# Altium PCB XIAO-log^2-2.PcbDoc
Units mm, origin at the board's own origin, x right, y up, seen from the top; angles counter-clockwise.
Board outline 17.78 x 20.96 mm, 2 copper layers (Top Layer, Bottom Layer); 17 components, 20 nets, 56 pads, 10 vias.
Unrouted connection lines stored in the file: 9.
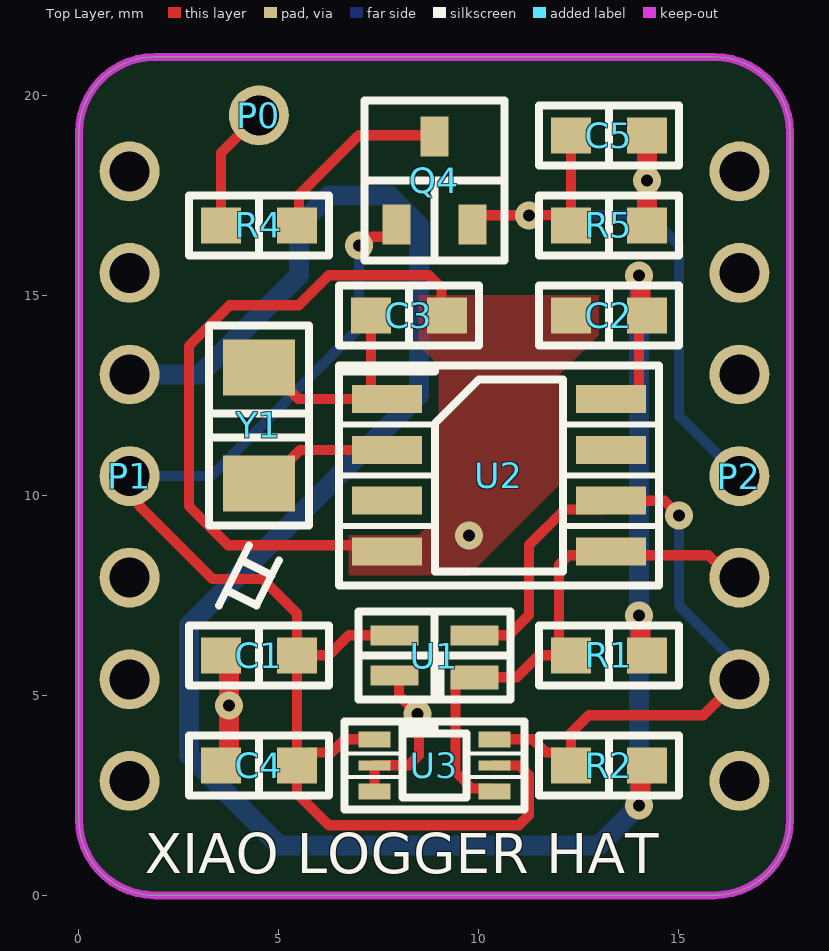
[diagram p0: Top Layer view]
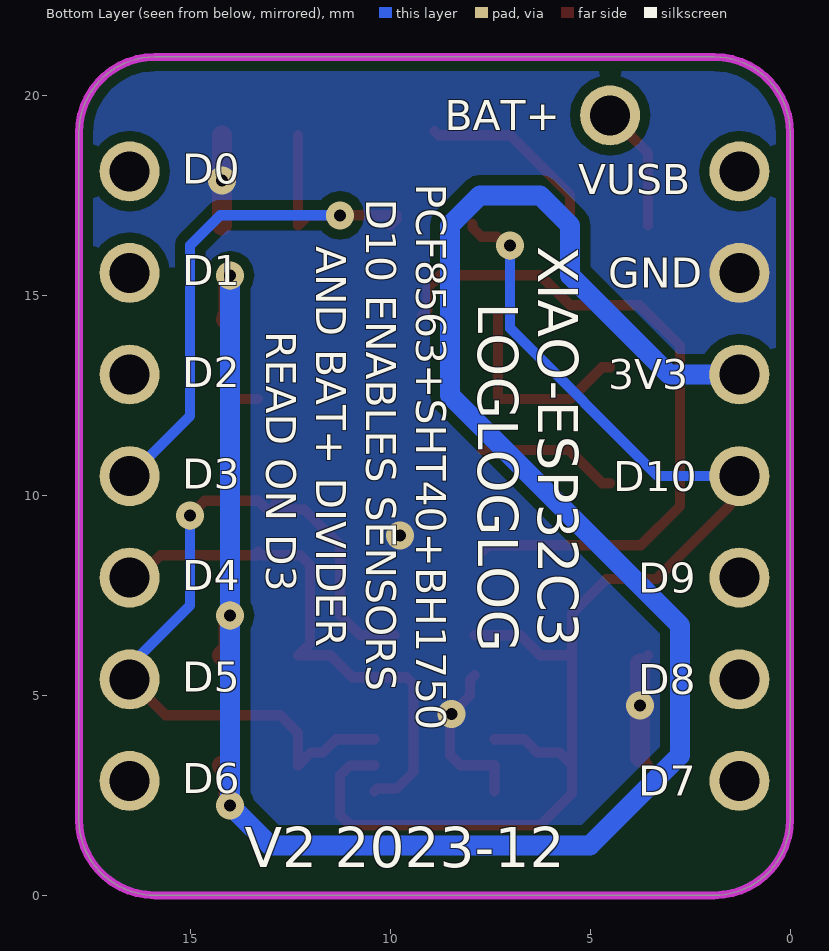
[diagram p1: Bottom Layer view, seen from below]
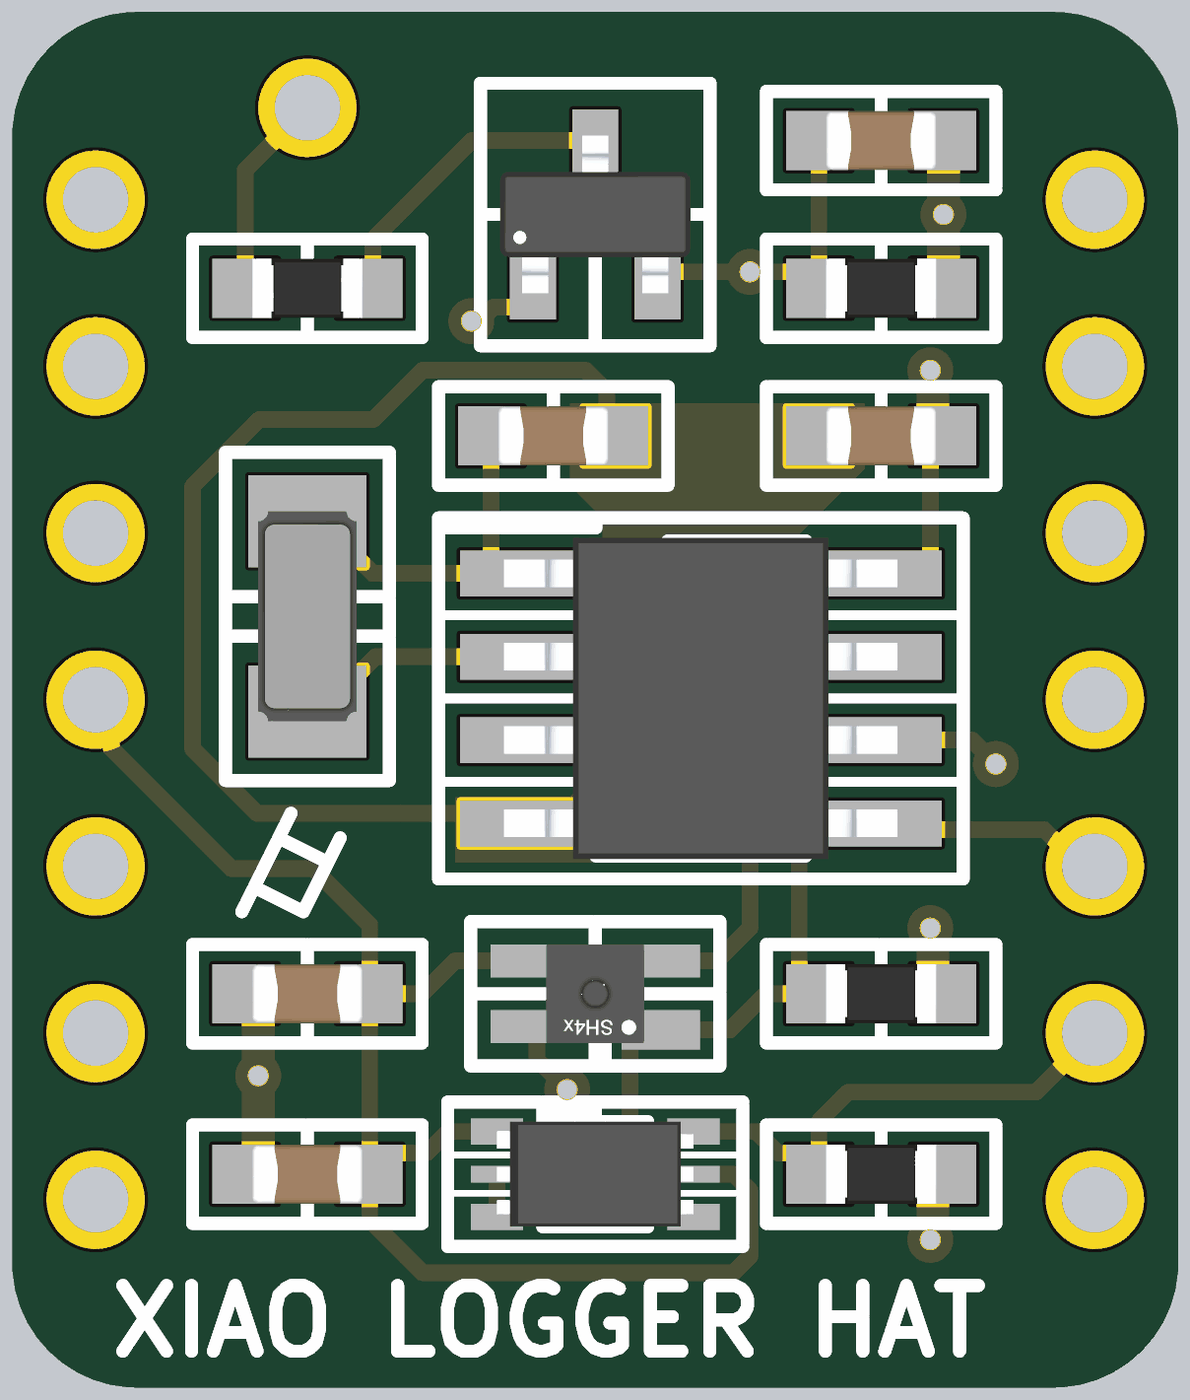
[diagram p2: 3D render of the assembled board from above, using the file's embedded part models]

## Layer stack, top to bottom
Top Solder: solder mask 0.0102, Solder Resist, Dk 3.5
Top Layer: signal copper 0.0356
Dielectric 1: dielectric 0.32, FR-4, Dk 4.8
Bottom Layer: signal copper 0.0356
Bottom Solder: solder mask 0.0102, Solder Resist, Dk 3.5

## Board outline
0,1.9 ccw(c1.9,1.9) 1.9,0 15.88,0 ccw(c15.88,1.9) 17.78,1.9 17.78,19.06 ccw(c15.88,19.06) 15.88,20.96 1.9,20.96 ccw(c1.9,19.06) 0,19.06

## Design rules (kind name [scope] priority, off if disabled: settings)
Clearance [All] p1: gap=0.254 ignorepadtopadclearanceinfootprint=FALSE except(0: Arc-Hole Track-Hole SMDPad-Hole THPad-Hole Via-Hole Fill-Hole Poly-Hole Region-Hole Text-Hole; 0.2: Arc-SMDPad Track-SMDPad SMDPad-SMDPad)
MinimumSolderMaskSliver [All] p1: minsoldermaskwidth=0.15
PlaneConnect [All] p1: planeconnectstyle=Direct reliefexpansion=0.508 reliefentries=4 reliefconductorwidth=0.254 reliefairgap=0.254
PolygonConnect [All] p1: connectstyle=Direct reliefconductorwidth=0.254 reliefentries=4 polygonreliefangle="90 Angle" airgapwidth=0.254
RoomDefinition XIAO-HAT [InComponentClass('XIAO-HAT')] p1: confinementstyle=ConfineIn formatcopy=TRUE lockcomponents=FALSE outline -106.68,-83.185 -55.88,-83.185 -55.88,-57.785 -106.68,-57.785
RoutingVias [All] p1: holewidth=0.711 width=1.27 viastyle="Through Hole" minholewidth=0.711 minwidth=1.27 maxholewidth=0.711 maxwidth=1.27
SilkToSolderMaskClearance [IsPad] p1: minsilkscreentomaskgap=0.1 clearancetoexposedcopper=TRUE
SolderMaskExpansion [All] p1: expansion=0.102 istentingtop=FALSE
Width [All] p1: maxlimit=2 minlimit=0.2 preferedwidth=0.254 minimp=50.000000 maximp=50.000000 favimp=50.000000
27 further rules are at their usual default settings.

## Components (designator, comment, footprint, x,y, rotation, side; value= is the part's Value field where it differs from the comment)
C1 "Capacitor" 0603CM 4.5,6 r180 top value=100n
C2 "Capacitor" 0603CM 13.25,14.5 r180 top value=100n
C3 "Capacitor" 0603CM 8.25,14.5 r0 top value=22p
C4 "Capacitor" 0603CM 4.5,3.25 r180 top value=100n
C5 "Capacitor" 0603CM 13.25,19 r0 top value=100n
P0 "BAT+" 1P-2.54mm 4.5,18.9 r0 top
P1 "7x2.54mm" 7P-2.54mm-nosilk 1.27,10.48 r270 top locked
P2 "7x2.54mm" 7P-2.54mm-nosilk 16.51,10.48 r270 top locked
Q4 "3400" "SOT23-3 M" 8.89,17.875 r0 top value=N-FET
R1 "Resistor" 0603RM 13.25,6 r0 top value=10K
R2 "Resistor" 0603RM 13.25,3.25 r0 top value=10K
R4 "Resistor" 0603RM 4.5,16.75 r180 top value=100K
R5 "Resistor" 0603RM 13.25,16.75 r180 top value=100K
U1 "SHT40" "DFN-4-EP(1.5x1.5) M" 8.89,6 r180 top
U2 "PCF8563" "SOP-8 M" 10.5,10.5 r270 top
U3 "BH1750FVI" "WSOF6 M" 8.89,3.25 r0 top
Y1 "Oscillator" "FC135 M" 4.5,11.75 r90 top value=32.768kHz

## Footprints (in the part's own frame and the unit in brackets; to place one, negate y for a bottom-side part, rotate by r counter-clockwise, add the part's x,y. Pads: shape width x height; smd on the part's side, far side on the other; paste and mask are expansions set on the pad)
1P-2.54mm [mm] "2-pin 2.54mm thru hole general footprint"
  round 1.5 hole 1 mask+0.05: 1(0,0.6)
7P-2.54mm-nosilk [mm] "7-pin 2.54mm thru hole general footprint"
  round 1.5 hole 1 mask+0.05: 1(-7.62,0) 2(-5.08,0) 3(-2.54,0) 4(0,0) 5(2.54,0) 6(5.08,0) 7(7.62,0)
0603CM [mm] "0603 capacitor for manual soldering"
  rect 1x0.9 smd mask+0.05: 1(-0.95,0) 2(0.95,0)
  silkscreen extent -1.75,-0.75 1.75,0.75, body extent -0.85,-0.45 0.85,0.45, height 0.9
0603RM [mm] "0603 resistor for manual soldering"
  rect 1x0.9 smd mask+0.05: 1(-0.95,0) 2(0.95,0)
  silkscreen extent -1.75,-0.75 1.75,0.75, body extent -0.85,-0.45 0.85,0.45, height 0.55
"DFN-4-EP(1.5x1.5) M" [mm]
  rect 1.2x0.6 smd mask+0: 1(-1,0.55)
  rect 1.2x0.5 smd mask+0: 2(-1,-0.5) 3(1,-0.5) 4(1,0.5)
  silkscreen extent -1.9,-1.1 1.9,1.1, body extent -0.75,-0.75 0.75,0.75, height 0.56
"FC135 M" [mm] "1206 oscillator for manual soldering"
  rect 1.4x1.8 smd mask+0.05: 1(-1.45,0) 2(1.45,0)
  silkscreen extent -2.5,-1.25 2.5,1.25, body extent -1.6,-0.75 1.6,0.75, height 0.9
"SOP-8 M" [mm] "SOP-8 for manual soldering"
  rect 0.7x1.75 smd mask+0.05: 1(-1.905,-2.8) 2(-0.635,-2.8) 3(0.635,-2.8) 4(1.905,-2.8) 5(1.905,2.8) 6(0.635,2.8) 7(-0.635,2.8) 8(-1.905,2.8)
  silkscreen extent -2.75,-4 2.75,4, body extent -2.45,-3 2.45,3, height 1.75
"SOT23-3 M" [mm] "SOT23-3 for manual soldering"
  rect 0.7x1 smd mask+0.05: 1(-0.95,-1.1) 2(0.95,-1.1) 3(0,1.1)
  silkscreen extent -1.75,-2 1.75,2, body extent -1.45,-1.2 1.45,1.2, height 1.1
"WSOF6 M" [mm]
  rect 0.8x0.4 smd mask+0: 1(-1.5,0.65) 3(-1.5,-0.65) 4(1.5,-0.65) 6(1.5,0.65)
  rect 0.8x0.25 smd mask+0: 2(-1.5,0) 5(1.5,0)
  silkscreen extent -2.25,-1.1 2.25,1.1, body extent -1.5,-0.8 1.5,0.8, height 0.75

## Part data
C1 C2 C4: "Capacitor 100nF ±10% 50V", Component=CL05B104KB54PNC
C3: "Capacitor 22pF ±5% 50V", Component=0402CG220J500NT
C5: "Capacitor 100nF ±10% 50V", JLC Code=C14663, Component=CC0603KRX7R9BB104
P0: library part "1-pin Header", "General 2-pin connection", Function="BAT CON"
P1 P2: library part "7-pins Header", "General 7-pin connection", Function="XIAO CON"
Q4: library part MOSFET-N, "MOSFET N-channel 30V 5.7A", JLC Code=C20917, Component=AO3400A, Function="VBAT-ADC enable"
R1 R2: "Resistor 10kΩ ±1% 1/16W", Component=0402WGF1002TCE
  R1: Function="SDA pull-up"
  R2: Function="SCL pull-up"
R4 R5: "Resistor 100kΩ ±1% 100mW", JLC Code=C25803, Component=0603WAF1003T5E
U1: "SHT40 temperature and humidity sensor", Component=SHT40-AD1B-R2, Function="T&H sensor"
U2: library part RTC-8563, "IC real-time clock with alarm interrupt", Component=PCF8563T/5,518, Function=RTC
U3: library part BH1750, "Digital light sensor", Component=BH1750FVI, Function="lux sensor"
Y1: library part XO-2, "Crystal oscillator 32.768kHz 20ppm 12.5pF", Component=Q13FC1350000400, Function="RTC XO"

## Via types
v1: diameter 0.7, hole 0.3, Top Layer to Bottom Layer, tented both sides, 10 vias

## Nets (pads, with @x,y where several pads share a name; then routed paths per layer and width w, separated by ;. In a path a pad name is that pad's centre, name@x,y a point inside that pad or via, vN(x,y) a via of type N, cw(c..) or ccw(c..) an arc to the next point about the centre after c; other vN are vias at no path point)
3V3: C2.1 P1.3 R1.2 R2.2 U2.8 | length 57.8
  Top Layer w0.254: U2.8 13.777,12.405 14,12.628 14,14.3 14.1,14.4 C2.1 ; R2.2 R2.2@14.25,3.2 ; R1.2 R1.2@14.25,6.05
  Top Layer w0.5: v1(14,2.25) 14.038,2.288 14.038,3.088 R2.2 ; v1(14,7) 14.038,6.962 14.038,6.162 R1.2 ; v1(14,15.5) 14.038,15.462 14.038,14.462 C2.1@14.1,14.4
  Bottom Layer w0.5: P1.3 3.02,13.02 5.5,15.5 5.5,16.75 6.25,17.5 7.75,17.5 8.5,16.75 8.5,12.5 2.75,6.75 2.75,3.5 5,1.25 13,1.25 v1(14,2.25) v1(14,7) v1(14,15.5)
BAT+: P0.1 R4.2 | length 3.1
  Top Layer w0.254: R4.2 3.55,18.55 P0.1
CLK: U2.7
D0/A0: P2.1
D1/A1: P2.2
D2/A2: P2.3
D3/A3: C5.1 P2.4 Q4.2 R5.2 | length 15.5
  Top Layer w0.254: Q4.2@9.84,16.9 Q4.2@9.99,16.75 ; Q4.2@9.84,17 v1(11.25,17) 12.05,17 R5.2 C5.1
  Bottom Layer w0.254: v1(11.25,17) 14.25,17 15,16.25 15,11.99 P2.4
D4/SDA: P2.5 R1.1 U1.1 U2.5 U3.4 | length 13.8
  Top Layer w0.254: U3.4 10.32,2.67 9.83,2.67 9.417,3.083 9.417,5.277 9.59,5.45 10.95,5.45 11.5,6 R1.1 12,6.3 12,8.25 12.25,8.5 13.205,8.5 U2.5 ; U2.5@13.3,8.5 15.738,8.5 16.298,7.94 P2.5
D5/SCL: P2.6 R2.1 U1.2 U2.6 U3.6 | length 20.2
  Top Layer w0.254: U1.2 10.75,6.5 11.25,7 11.25,8.75 12.142,9.642 13.077,9.642 U2.6 14.635,9.865 v1(15,9.5) ; U3.6 11.35,3.9 11.677,3.573 11.977,3.573 R2.1 12.3,4.05 12.75,4.5 15.61,4.5 P2.6 ; U2.6@12.8,9.865 U2.6@12.858,9.807
  Bottom Layer w0.254: v1(15,9.5) 15,7.247 16.51,5.737 P2.6
D6/TX: P2.7
D7/RX: P1.7
D8/SCK: P1.6
D9/MISO: P1.5
D10/MOSI: C1.1 C4.1 P1.4 Q4.1 U1.3 U3.1 U3.5 | length 34
  Top Layer w0.254: P1.4 1.508,10.242 1.508,9.742 3.345,7.905 4.595,7.905 5.45,7.05 C1.1 6.25,6 6.75,6.5 U1.3 ; C1.1@5.45,5.95 C4.1 ; v1(7,16.25) 7.121,16.25 7.333,16.462 7.717,16.462 7.94,16.685 Q4.1 ; U3.1 6.65,3.9 6.323,3.573 5.773,3.573 C4.1 ; U3.5 10.392,3.248 11.002,3.248 11.25,3 11.25,2 11,1.75 6.25,1.75 5.45,2.55 C4.1
  Bottom Layer w0.254: P1.4@1.29,10.5 P1.4 3.306,10.48 7,14.174 v1(7,16.25)
GND: C1.2 C2.2 C3.2 C4.2 C5.2 P1.2 R5.1 U1.4 U2.4 U3.2 U3.3 | length 26.6
  Top Layer w0.254: C4.2 C4.2@3.75,3.45 ; C1.2 C1.2@3.75,5.8 ; U3.3 U3.2 8.25,3.25 8.5,3.5 8.5,4.5 8,5 8,5.39 U1.4 ; U2.4 7.545,8.75 3.733,8.75 2.75,9.733 2.75,13.733 3.767,14.75 5.5,14.75 6.25,15.5 8.75,15.5 9.068,15.182 9.068,14.632 C3.2
  Top Layer w0.5: C4.2@3.75,3.45 v1(3.75,4.75) C1.2@3.75,5.8 ; R5.1 C5.2
  other v1: 8.462,4.538 9.75,9 14.2,17.875
INT: U2.3
NetC3_1: C3.1 U2.1 Y1.2 | length 5.2
  Top Layer w0.254: Y1.2 4.7,13.2 5.495,12.405 7.25,12.405 7.3,12.455 C3.1
NetQ4_3: Q4.3 R4.1 | length 4.8
  Top Layer w0.254: R4.1 5.5,16.8 5.5,17.5 7,19 8.79,19 Q4.3@8.89,19.1
NetU2_2: U2.2 Y1.1 | length 3.5
  Top Layer w0.254: Y1.1 4.7,10.3 5.535,11.135 U2.2
VUSB: P1.1

## Polygon pours and split planes (outlines as drawn)
GND on Top Layer "GND_L01_P000" (solid, pour order 0): 8.5,15 13,15 13,14 12,13 12,10.25 9.75,8 6.75,8 6.75,9 8.5,9 9,9.5 9,13.25 8.5,13.75
GND on Bottom Layer "GND_L02_P001" (solid, remove dead copper, pour order 1): 0,0 17.75,0 17.75,21 0,21

## Keep-outs
Keep-Out Layer:
  the board outline again, w0.2

## Silkscreen, mask and mechanical layers (free items; w line width, h text height)
Top Overlay:
  lines w0.2: 3.5,7.25 3.688,7.625 ; 4.25,8.75 4.063,8.375 ; 5,8.375 4.812,8 ; 3.688,7.625 4.063,8.375 ; 3.688,7.625 4.437,7.25 4.812,8 ; 4.063,8.375 4.812,8
  text "XIAO LOGGER HAT" at 1.642,0.55 h1
Bottom Overlay:
  text "BAT+" at 8.629,19.125 h0.75
  text "PCF8563+SHT40+BH1750" at 9.35,17.79 h0.75 r90
  text "D0" at 15.2,17.785 h0.75
  text "VUSB" at 5.299,17.525 h0.75
  text "D10 ENABLES SENSORS" at 10.6,17.415 h0.75 r90
  text "XIAO-ESP32C3" at 6.3,16.228 h1 r90
  text "AND BAT+ DIVIDER" at 11.85,16.228 h0.75 r90
  text "D1" at 15.2,15.245 h0.75
  text "GND" at 4.549,15.185 h0.75
  text "LOGLOGLOG" at 7.8,14.812 h1 r90
  text "READ ON D3" at 13.1,14.104 h0.75 r90
  text "D2" at 15.2,12.705 h0.75
  text "3V3" at 4.549,12.645 h0.75
  text "D3" at 15.2,10.165 h0.75
  text "D10" at 4.424,10.105 h0.75
  text "D4" at 15.2,7.625 h0.75
  text "D9" at 3.8,7.565 h0.75
  text "D5" at 15.2,5.085 h0.75
  text "D8" at 3.8,5.025 h0.75
  text "D6" at 15.2,2.545 h0.75
  text "D7" at 3.8,2.485 h0.75
  text "V2 2023-12" at 13.638,0.7 h1